# EAGLE board h-bridge2 (EAGLE 6.5.0)
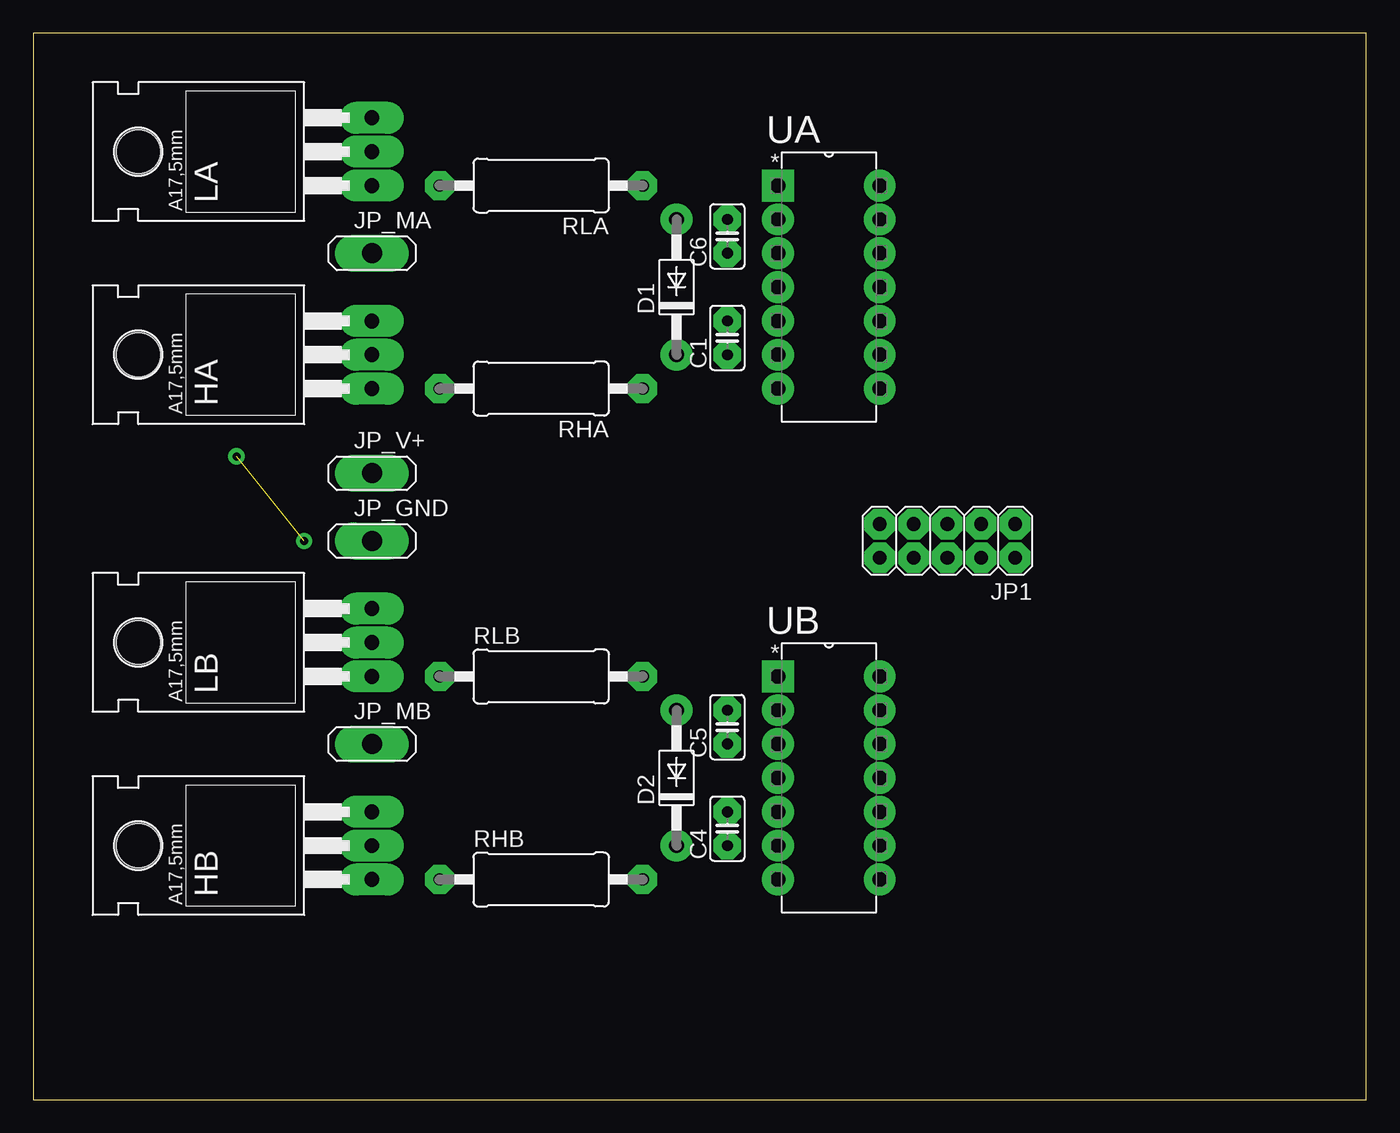
[diagram p0: board, top side]
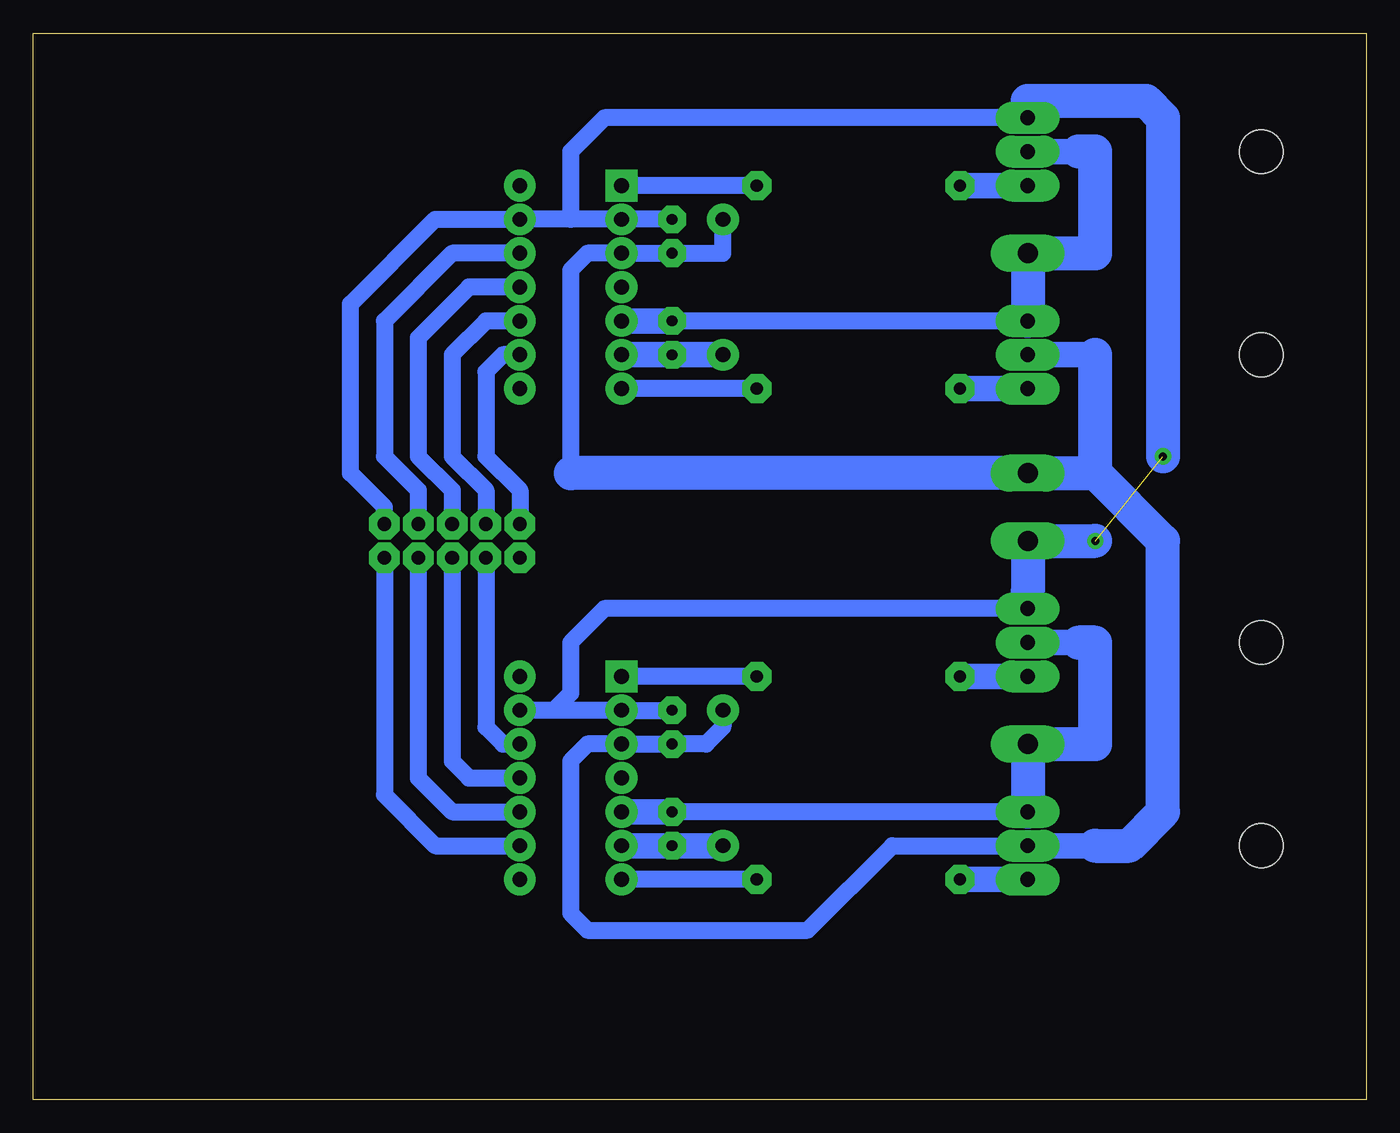
[diagram p1: board, bottom side, seen from below]

Size 100 x 80 mm. Coordinates in mm from the lower left corner, seen from the top.
Outline: 0,0 100,0 100,80 0,80 0,0
Copper layers (1*16): Top 0.035mm / dielectric 1.5mm / Bottom 0.035mm
Design rules "default": minimum track width 10mil, minimum drill 32mil, track to track 16mil, track to pad 16mil, pad to pad 16mil, via to via 16mil, smd to smd 12mil, copper to edge 40mil, drill to drill 40mil, minimum pad ring 25mil, minimum via ring 12mil, stop-mask expansion 4mil, vias tented up to drill 0mil, thermal gap 10mil

## Footprints (pad centres in the part's own frame; a part is rotated, then mirrored left to right if it is on the bottom)
C025-025X050 = drill 0.813 octagon: 1 -1.27,0; 2 1.27,0
DO41-10 = drill 1.118: A 5.08,0; C -5.08,0
TO220BH = drill 1.118 long: D 0,-6.35; G -2.54,-6.35; S 2.54,-6.35 | hole 3.302: 0,11.176
2X05 = drill 1.016 octagon: 1 -5.08,-1.27; 2 -5.08,1.27; 3 -2.54,-1.27; 4 -2.54,1.27; 5 0,-1.27; 6 0,1.27; 7 2.54,-1.27; 8 2.54,1.27; 9 5.08,-1.27; 10 5.08,1.27
1X01 = drill 1.5 long: 1 0,0
TO220BH' = drill 1.118 pad 1.93 long: D 0,-6.35; G -2.54,-6.35; S 2.54,-6.35 | hole 3.302: 0,11.176
0411/15 = drill 0.914 octagon: 1 -7.62,0; 2 7.62,0
DIP254P762X533-14 = drill 1.118 pad 1.93 square: 1 -7.62,15.24 | drill 1.118 pad 1.93: 2 -7.62,12.7; 3 -7.62,10.16; 4 -7.62,7.62; 5 -7.62,5.08; 6 -7.62,2.54; 7 -7.62,0; 8 0,0; 9 0,2.54; 10 0,5.08; 11 0,7.62; 12 0,10.16; 13 0,12.7; 14 0,15.24

## Placement (x,y rotation side)
C1  [C025-025X050]  52.07,57.15 90 top
C4  [C025-025X050]  52.07,20.32 90 top
C5  [C025-025X050]  52.07,27.94 90 top
C6  [C025-025X050]  52.07,64.77 90 top
D1  1N4004  [DO41-10]  48.26,60.96 90 top
D2  1N4004  [DO41-10]  48.26,24.13 90 top
HA  IRLZ44Z  [TO220BH]  19.05,55.88 90 top
HB  IRLZ44Z  [TO220BH]  19.05,19.05 90 top
JP1  [2X05]  68.58,41.91 180 top
JP_GND  [1X01]  25.4,41.91 0 top
JP_MA  [1X01]  25.4,63.5 0 top
JP_MB  [1X01]  25.4,26.67 0 top
JP_V+  [1X01]  25.4,46.99 0 top
LA  IRLZ44Z  [TO220BH]  19.05,71.12 90 top
LB  IRLZ44Z  [TO220BH']  19.05,34.29 90 top
RHA  [0411/15]  38.1,53.34 180 top
RHB  [0411/15]  38.1,16.51 0 top
RLA  [0411/15]  38.1,68.58 180 top
RLB  [0411/15]  38.1,31.75 0 top
UA  IR2110PBF  [DIP254P762X533-14]  63.5,53.34 0 top
UB  IR2110PBF  [DIP254P762X533-14]  63.5,16.51 0 top

## Library data of the parts
C1 C4-C6 RHA RHB RLA RLB = rcl
D1 D2 = diode
HA HB LA = transistor-power
JP1 = pinhead
JP_GND JP_MA JP_MB JP_V+ LB = dbg-misc
UA UB = dbg-misc; MPN: IR2110PBF; OC_FARNELL: 8638837; OC_NEWARK: 63J7859; PACKAGE: PDIP-14; SUPPLIER: INTERNATIONAL RECTIFIER

## Nets
N$4: C5.2 C6.2 JP1.1 JP_GND.1 LA.S LB.S UA.2 UA.13 UB.2 UB.13
N$5: LA.G RLA.2
N$6: HA.G RHA.2
N$7: HB.G RHB.1
N$8: LB.G RLB.1
N$9: RHA.1 UA.7
N$10: RLA.1 UA.1
N$11: RHB.2 UB.7
N$12: RLB.2 UB.1
N$13: C5.1 C6.1 D1.A D2.A HA.D HB.D JP_V+.1 UA.3 UB.3
N$14: C1.1 D1.C UA.6
N$16: C4.2 HB.S JP_MB.1 LB.D UB.5
N$17: C1.2 HA.S JP_MA.1 LA.D UA.5
N$18: C4.1 D2.C UB.6
N$20: JP1.5 UA.11
N$22: JP1.9 UA.9
N$23: JP1.7 UA.10
N$24: JP1.3 UA.12
N$25: JP1.2 UB.9
N$26: JP1.4 UB.10
N$27: JP1.6 UB.11
N$28: JP1.8 UB.12

## Tracks (layer width: path | path; a pad name or v marks a point on that pad's centre or on a via)
N$1  (via drill 0.6)
  other vias: 20.32,41.91
N$4  (via drill 0.6)  (1 unrouted)
  Bottom 1.27: C5.2 UB.2 UB.13 60.96,29.21 59.69,30.48 59.69,34.29 57.15,36.83 LB.S | C6.2 UA.2 59.69,66.04 | 59.69,66.04 UA.13 69.85,66.04 76.2,59.69 76.2,46.99 73.66,44.45 JP1.1 | 26.67,73.66 LA.S 57.15,73.66 59.69,71.12 59.69,66.04
  Bottom 1.93: 25.4,38.1 LB.S | LA.S 25.4,74.93
  Bottom 2.54: 25.4,38.1 JP_GND.1 20.32,41.91 | 25.4,74.93 16.51,74.93 15.24,73.66 v15.24,48.26
N$5
  Bottom 1.93: LA.G RLA.2
N$6
  Bottom 1.93: HA.G RHA.2
N$7
  Bottom 1.93: HB.G RHB.1
N$8
  Bottom 1.93: LB.G RLB.1
N$9
  Bottom 1.27: RHA.1 UA.7
N$10
  Bottom 1.27: RLA.1 UA.1
N$11
  Bottom 1.27: RHB.2 UB.7
N$12
  Bottom 1.27: RLB.2 UB.1
N$13
  Bottom 1.27: D2.A 48.26,27.94 49.53,26.67 C5.1 UB.3 58.42,26.67 59.69,25.4 59.69,13.97 58.42,12.7 41.91,12.7 35.56,19.05 HB.D | D1.A 48.26,63.5 C6.1 UA.3 58.42,63.5 59.69,62.23 59.69,46.99
  Bottom 1.93: 20.32,55.88 HA.D | HB.D 20.32,19.05
  Bottom 2.54: 20.32,46.99 JP_V+.1 59.69,46.99 | 20.32,46.99 20.32,55.88 | 20.32,19.05 17.78,19.05 15.24,21.59 15.24,41.91 20.32,46.99
N$14
  Bottom 1.93: UA.6 C1.1 D1.C
N$16
  Bottom 1.27: HB.S C4.2
  Bottom 1.93: 21.59,34.29 LB.D | C4.2 UB.5
  Bottom 2.54: 21.59,34.29 20.32,34.29 20.32,26.67 JP_MB.1 HB.S
N$17
  Bottom 1.27: HA.S C1.2
  Bottom 1.93: 21.59,71.12 LA.D | C1.2 UA.5
  Bottom 2.54: 21.59,71.12 20.32,71.12 20.32,63.5 JP_MA.1 HA.S
N$18
  Bottom 1.93: UB.6 C4.1 D2.C
N$20
  Bottom 1.27: UA.11 67.31,60.96 71.12,57.15 71.12,48.26 68.58,45.72 JP1.5
N$22
  Bottom 1.27: UA.9 64.77,55.88 66.04,54.61 66.04,48.26 63.5,45.72 JP1.9
N$23
  Bottom 1.27: UA.10 66.04,58.42 68.58,55.88 68.58,48.26 66.04,45.72 JP1.7
N$24
  Bottom 1.27: UA.12 68.58,63.5 73.66,58.42 73.66,48.26 71.12,45.72 JP1.3
N$25
  Bottom 1.27: JP1.2 73.66,22.86 69.85,19.05 UB.9
N$26
  Bottom 1.27: JP1.4 71.12,24.13 68.58,21.59 UB.10
N$27
  Bottom 1.27: JP1.6 68.58,25.4 67.31,24.13 UB.11
N$28
  Bottom 1.27: JP1.8 66.04,27.94 64.77,26.67 UB.12